# EAGLE board AVR_12V_reset5 (EAGLE 9.5.2)
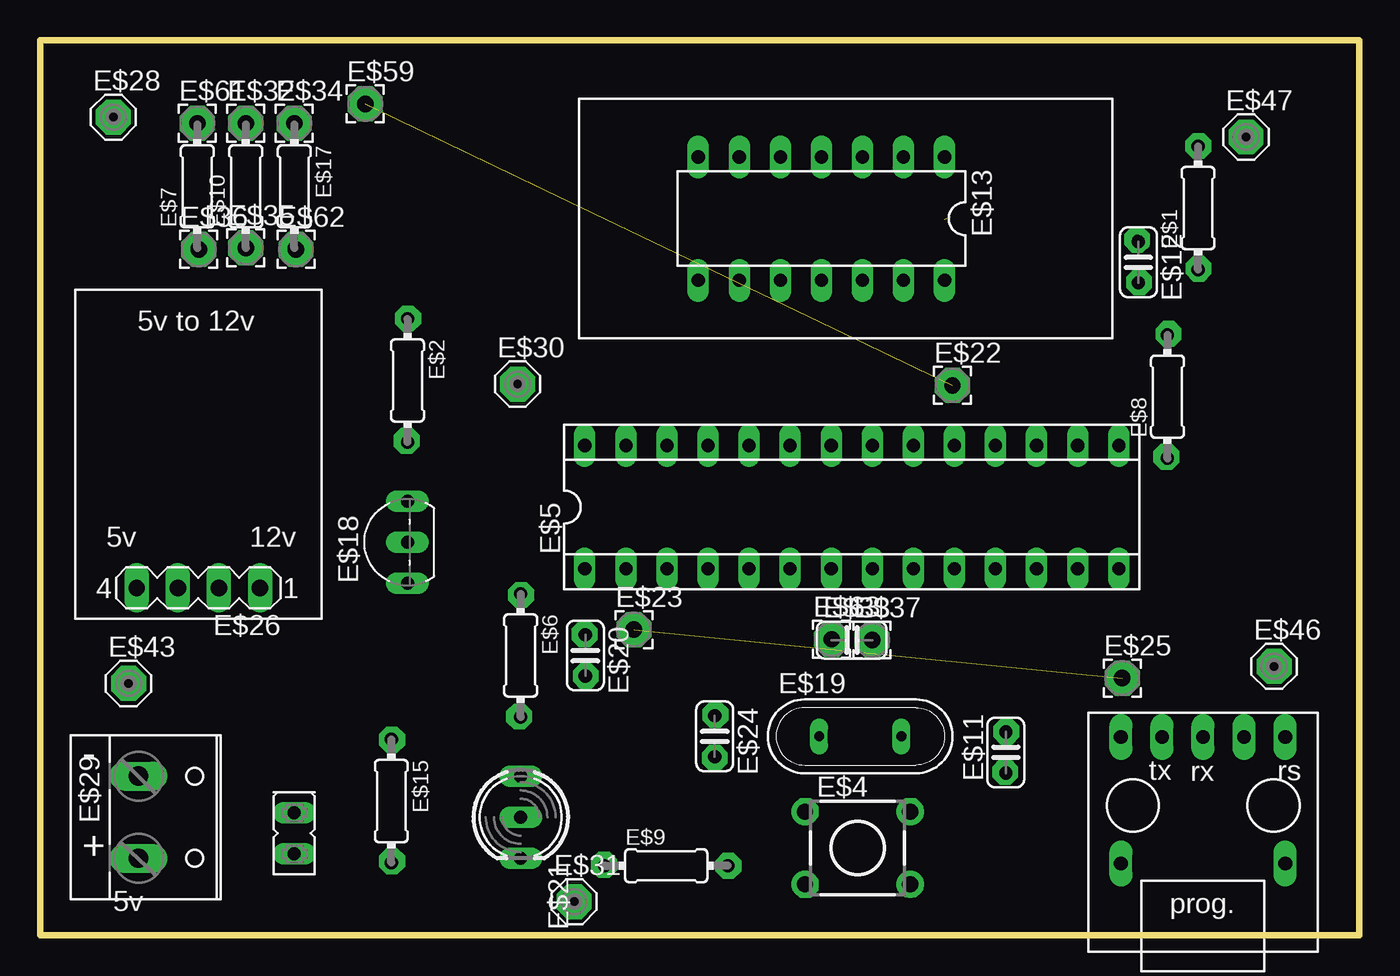
[diagram p0: board, top side]
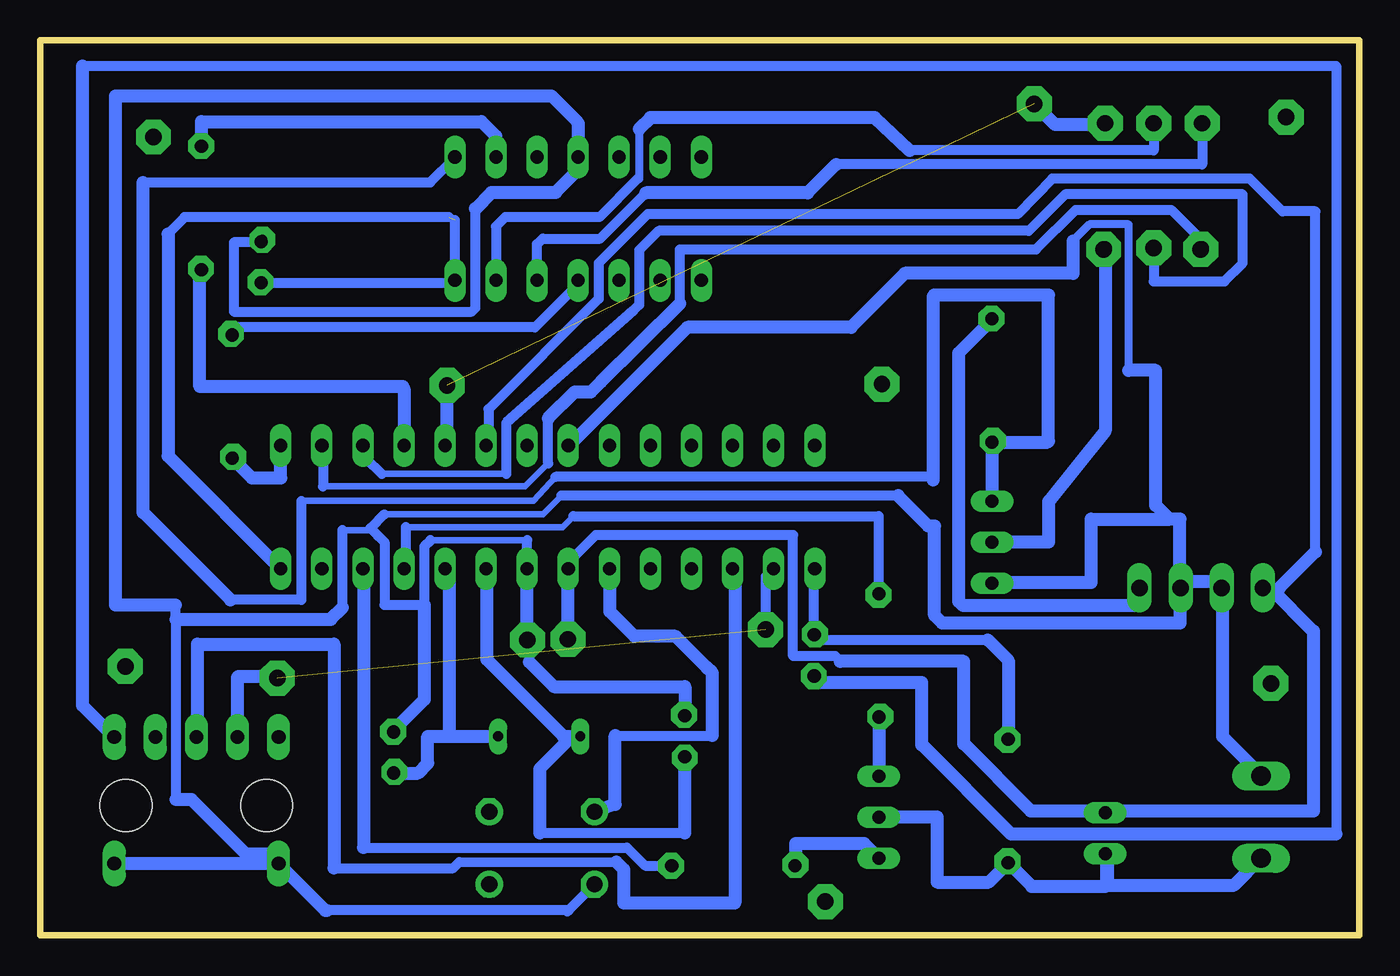
[diagram p1: board, bottom side, seen from below]

Size 81.55 x 55.32 mm. Coordinates in mm from the lower left corner, seen from the top.
Outline: 0,0 0,55.32 81.55,55.32 81.55,0 0,0
Copper layers (1*16): Top 0.035mm / dielectric 1.5mm / Bottom 0.035mm
Design rules "default": minimum track width 10mil, minimum drill 24mil, track to track 8mil, track to pad 8mil, pad to pad 8mil, via to via 8mil, smd to smd 8mil, copper to edge 40mil, drill to drill 8mil, minimum pad ring 10mil, minimum via ring 8mil, stop-mask expansion 4mil, vias tented up to drill 0mil, thermal gap 10mil

## Footprints (pad centres in the part's own frame; a part is rotated, then mirrored left to right if it is on the bottom)
0204/7 = drill 0.813 octagon: 1 -3.81,0; 2 3.81,0
FE02-1 = drill 0.813 long: 1 -1.27,0; 2 1.27,0
TL1105 = drill 1 pad 1.676: 1 -2.25,3.25; 2 2.25,3.25; 3 -2.25,-3.25; 4 2.25,-3.25
SOCKET-28-3 = drill 0.813 long: 1 -16.51,-3.81; 2 -13.97,-3.81; 3 -11.43,-3.81; 4 -8.89,-3.81; 5 -6.35,-3.81; 6 -3.81,-3.81; 7 -1.27,-3.81; 8 1.27,-3.81; 9 3.81,-3.81; 10 6.35,-3.81; 11 8.89,-3.81; 12 11.43,-3.81; 13 13.97,-3.81; 14 16.51,-3.81; 15 16.51,3.81; 16 13.97,3.81; 17 11.43,3.81; 18 8.89,3.81; 19 6.35,3.81; 20 3.81,3.81; 21 1.27,3.81; 22 -1.27,3.81; 23 -3.81,3.81; 24 -6.35,3.81; 25 -8.89,3.81; 26 -11.43,3.81; 27 -13.97,3.81; 28 -16.51,3.81
C025-024X044 = drill 0.813 octagon: 1 -1.27,0; 2 1.27,0
DIL14 = drill 0.813 long: 1 -7.62,-3.81; 2 -5.08,-3.81; 3 -2.54,-3.81; 4 0,-3.81; 5 2.54,-3.81; 6 5.08,-3.81; 7 7.62,-3.81; 8 7.62,3.81; 9 5.08,3.81; 10 2.54,3.81; 11 0,3.81; 12 -2.54,3.81; 13 -5.08,3.81; 14 -7.62,3.81
USB-MICRO-PCB = drill 0.85 pad 1.422 long: P$1 -5.08,6.35; P$2 -2.54,6.35; P$3 0,6.35; P$4 2.54,6.35; P$5 5.08,6.35; P$6 -5.08,-1.47; P$7 5.08,-1.47 | hole 3.2: -4.34,2.12; 4.36,2.12
TO92- = drill 0.813 long: 1 2.54,0; 2 0,0; 3 -2.54,0
QS = drill 0.61 long: 1 -2.54,0; 2 2.54,0
DUOLED5MM = drill 0.813 long: AG -2.54,0; AR 2.54,0; K 0,0
2,15/1,0 = drill 1.016 pad 2.159 octagon: 1 0,0
MA04-1 = drill 1.016 long: 1 -3.81,0; 2 -1.27,0; 3 1.27,0; 4 3.81,0
MCS10B = drill 1.016 pad 2.159 octagon: MP 0,0
W237-132 = drill 1.194 long: 1 -2.54,-0.635; 2 2.54,-0.635

## Placement (x,y rotation side)
E$1  1k  [0204/7]  71.59,44.96 90 top
E$2  1k  [0204/7]  22.7,34.3 270 top
E$3  [FE02-1]  15.7,6.3 90 top
E$4  [TL1105]  50.53,5.39 270 top
E$5  [SOCKET-28-3]  50.17,26.47 0 top
E$6  220  [0204/7]  29.7,17.3 270 top
E$7  1k  [0204/7]  9.7,46.3 90 top
E$8  1k  [0204/7]  69.7,33.3 90 top
E$9  220  [0204/7]  38.7,4.3 0 top
E$10  1k  [0204/7]  12.7,46.3 90 top
E$11  22p  [C025-024X044]  59.7,11.3 90 top
E$12  1uF  [C025-024X044]  67.91,41.61 270 top
E$13  [DIL14]  48.3,44.3 180 top
E$15  10k  [0204/7]  21.7,8.3 270 top
E$16  [USB-MICRO-PCB]  71.9,5.9 0 top
E$17  2.2k  [0204/7]  15.7,46.3 270 top
E$18  s8050  [TO92-]  22.7,24.3 90 top
E$19  [QS]  50.7,12.3 0 top
E$20  1uF  [C025-024X044]  33.7,17.3 270 top
E$21  red/green  [DUOLED5MM]  29.7,7.3 270 top
E$22  [2,15/1,0]  56.4,34 0 top
E$23  [2,15/1,0]  36.7,18.9 0 top
E$24  22p  [C025-024X044]  41.7,12.3 270 top
E$25  [2,15/1,0]  66.9,15.9 0 top
E$26  [MA04-1]  9.77,21.48 180 top
E$28  [MCS10B]  4.51,50.57 0 top
E$29  [W237-132]  6.7,7.3 270 top
E$30  [MCS10B]  29.51,34.07 0 top
E$31  [MCS10B]  33.01,2.08 0 top
E$32  [2,15/1,0]  12.7,50.2 0 top
E$33  1uF  [C025-024X044]  50.17,18.25 0 top
E$34  [2,15/1,0]  15.7,50.2 0 top
E$35  [2,15/1,0]  12.7,42.5 0 top
E$36  [2,15/1,0]  9.8,42.4 0 top
E$37  [2,15/1,0]  51.44,18.25 0 top
E$43  [MCS10B]  5.45,15.57 0 top
E$46  [MCS10B]  76.3,16.62 0 top
E$47  [MCS10B]  74.56,49.35 0 top
E$59  [2,15/1,0]  20.09,51.4 0 top
E$61  [2,15/1,0]  9.7,50.2 0 top
E$62  [2,15/1,0]  15.8,42.4 0 top
E$63  [2,15/1,0]  48.93,18.3 0 top

## Library data of the parts
E$1 E$2 E$6-E$10 E$15 E$17 = eagle-ltspice
E$3 = con-lsta2
E$4 = switch
E$5 = ic-package
E$11 E$12 E$20 E$24 E$33 = ref-packages
E$13 = 74ac-logic
E$16 = LSGPackages
E$18 = transistor-fet
E$19 = special
E$21 = led
E$22 E$23 E$25 E$32 E$34-E$37 E$59 E$61-E$63 = wirepad
E$26 = con-lstb
E$28 E$30 E$31 E$43 E$46 E$47 = solpad
E$29 = con-wago-508

## Nets
12V: E$2.1 E$26.1
GND: E$4.4 E$5.8 E$5.22 E$11.2 E$12.1 E$13.4 E$16.P$6 E$16.P$7 E$18.3 E$24.1 E$26.2 E$26.3 E$29.1 E$33.2
S$2: E$1.2 E$13.2
S$3: E$5.15 E$8.1
S$4: E$17.2 E$18.2
S$5: E$5.2 E$16.P$2 E$23.1 E$25.1
S$7: E$2.2 E$13.1 E$18.1
S$8: E$5.14 E$12.2 E$13.14
S$9: E$5.10 E$11.1 E$19.2
S$10: E$5.9 E$19.1 E$24.2
S$11: E$5.3 E$16.P$3
S$12: E$6.2 E$21.AG
S$13: E$5.16 E$7.1
S$14: E$7.2 E$13.12
S$15: E$5.17 E$10.1
S$16: E$3.1 E$15.2 E$21.K E$29.2
S$17: E$1.1 E$5.18
S$18: E$8.2 E$13.11
S$19: E$5.19 E$17.1 E$22.1 E$59.1
S$20: E$16.P$5 E$20.2
S$21: E$4.3 E$5.6
S$22: E$9.1 E$21.AR
S$23: E$5.11 E$6.1
S$24: E$5.12 E$9.2
S$26: E$10.2 E$13.13
S$27: E$5.1 E$15.1 E$20.1
VCC: E$3.2 E$5.7 E$5.20 E$26.4 E$33.1

## Tracks (layer width: path | path; a pad name or v marks a point on that pad's centre or on a via)
12V
  Bottom 0.61: E$26.1 13.57,20.38 | 22.7,38.05 E$2.1
  Bottom 0.813: 22.7,38.05 24.75,36 24.75,20.62 24.5,20.38 13.57,20.38
GND
  Bottom 0.254: E$12.1 67.96,42.83
  Bottom 0.406: 51.45,24.43 57.42,24.43 | 49.33,27.17 50.48,26.03 60.28,26.03 | 62.86,25.04 61.02,25.04 60.67,24.7
  Bottom 0.508: 17.7,42.92 16.68,43.95 14.25,43.95 14.25,34.92
  Bottom 0.61: 51.33,16.9 51.33,18.18 E$33.2 51.45,18.3 | 51.45,22.55 E$5.8 51.45,22.68 51.45,24.43 | 57.81,20.43 57.81,24.04 57.42,24.43 | 59.7,12.68 E$11.2 | 73.17,8.38 73.17,19.53 73.2,19.53 73.2,20.43 | 48.34,50.29 48.3,50.19 | 57.81,20.43 60.28,20.43 60.28,24.3 60.67,24.7 61.14,25.16 60.28,26.03 | 57.81,20.43 | 62.86,20.26 62.86,25.04 | 11.07,21.55 E$26.2 11.07,21.43 | 6.07,9.93 E$29.1 | 8.45,21.43 E$26.3 | 28.51,27.17 49.33,27.17 | 48.83,30.3 E$5.22 | 22.7,21.8 E$18.3 | 67.96,42.83 69.59,42.83 69.59,38.55 54.88,38.55 54.65,38.78 54.65,44.93 | 48.3,47.31 E$13.4 | 63.82,1.55 48.89,1.55 E$4.4 48.95,1.47
  Bottom 0.813: 51.33,16.9 49.8,15.38 41.7,15.38 E$24.1 | 51.45,18.3 51.45,22.55 | 59.7,12.68 57.81,14.56 57.81,20.43 | 48.34,50.29 49.95,51.9 76.9,51.9 76.9,20.43 73.2,20.43 | 48.3,50.19 E$13.4 | 62.86,20.26 63.6,19.53 73.17,19.53 | 11.72,25.73 11.07,25.73 11.07,21.55 | E$26.3 8.97,21.89 10.53,21.89 E$26.2 | 6.07,9.93 8.45,12.3 8.45,21.43 | 28.51,27.17 26.64,25.3 26.25,25.3 26.25,19.78 25.78,19.3 11.07,19.3 11.07,21.43 | 48.83,30.3 41.55,37.58 31.42,37.58 28.09,40.91 17.7,40.91 17.7,42.92 | 22.7,21.8 16.59,21.8 16.59,25.73 11.72,25.73 | 14.25,34.92 12.57,34.92 12.57,26.58 11.72,25.73 | 54.65,44.93 53.65,45.92 49.69,45.92 48.3,47.31 | 63.82,1.55 63.94,1.55 E$16.P$6 | E$16.P$6 67.39,5 68.81,5 72.2,8.38 73.17,8.38 | E$16.P$6 E$16.P$7
S$2
  Bottom 0.813: E$13.2 53.38,49.4 54.28,50.3 71.59,50.3 E$1.2
S$3
  Bottom 0.813: E$8.1 68.48,28.28 66.69,28.28 E$5.15
S$4
  Bottom 0.813: E$18.2 19.2,24.3 19.2,26.82 15.7,31.19 E$17.2
S$5  (1 unrouted)
  Bottom 0.61: E$5.2 36.7,22.16 E$23.1 | 69.36,15.94 69.3,16 | 67,16 E$25.1
  Bottom 0.813: E$16.P$2 69.36,15.94 | 69.3,16 67,16
S$7
  Bottom 0.406: 49.7,28.34 51.05,26.85 65.42,26.85
  Bottom 0.61: 75.2,46.55 57.45,46.55 55.95,48.05 E$13.1 | 69.79,20.74 65.42,20.74 65.42,26.85 | 26.35,28.15 26.54,28.34 49.7,28.34 | 26.28,39.57 26.35,39.5 | 19.26,30.49 19.2,30.55
  Bottom 0.813: E$18.1 E$2.2 19.26,30.49 | 75.2,46.55 75.2,26.15 69.79,20.74 | 26.35,39.5 26.35,28.15 | 26.28,39.57 19.2,39.57 19.2,30.55
S$8  (1 unrouted)
  Bottom 0.254: 56.07,40.34 E$13.14
  Bottom 0.61: 55.83,40.55 E$13.14 55.92,44.22 | 73.66,43.37 72.63,44.39 56.29,44.39 | E$12.2 56.07,40.34
  Bottom 0.813: E$5.14 73.66,29.63 73.66,43.37
S$9
  Bottom 0.61: E$5.10 56.27,22.4
  Bottom 0.813: 56.27,12.3 57.59,12.3 57.59,10.64 58.2,10.03 E$11.1 | 56.27,12.3 E$19.2 | 56.27,22.4 56.27,12.3
S$10
  Bottom 0.61: 53.95,22.55 E$5.9 | 50.67,6.33 41.7,6.33 | E$19.1 48.66,12.3
  Bottom 0.813: 53.95,22.55 53.95,17.05 49.2,12.3 E$19.1 | 48.66,12.3 50.67,10.29 50.67,6.33 | 41.7,6.33 E$24.2
S$11
  Bottom 0.61: E$5.3 38.6,22.52 | 63.4,4.15 56.03,4.15 55.64,4.53 45.92,4.52 | 71.83,12.3 E$16.P$3
  Bottom 0.813: 38.6,22.52 38.6,2 45.47,2 45.47,4.08 45.92,4.52 | 63.4,4.15 63.4,18 71.83,18 71.83,12.3
S$12
  Bottom 0.813: E$6.2 E$21.AG
S$13
  Bottom 0.406: 50.15,29.18 51.58,27.75 64.08,27.75
  Bottom 0.61: E$7.1 9.7,42.92 11.62,44.85 17.53,44.85 19.98,42.4 42,42.4 42,39.05 | 50.15,29.18 50.15,31.95 | 64.08,27.75 64.08,30.18 E$5.16
  Bottom 0.813: 50.15,31.95 48.5,33.6 47.5,33.6 46.9,34.2 42,39.05
S$14
  Bottom 0.61: E$13.12 50.84,42.72 50.49,43.07 46.93,43.07 44.11,45.89 | 32.35,47.65 9.7,47.65 E$7.2
  Bottom 0.813: 32.35,47.65 34.11,45.89 44.11,45.89
S$15
  Bottom 0.406: 52.75,28.52 60.45,28.52
  Bottom 0.61: 60.45,28.52 61.36,29.43 E$5.17 | 52.75,28.52 52.75,31.68 44.9,38.6 44.53,38.97 44.53,42.35 43.33,43.55 20.43,43.55 18.18,45.8 7.2,45.8 7.2,41.55 8.32,40.42 12.7,40.42 E$10.1
S$16
  Bottom 0.61: 15.7,3.02 E$3.1 15.57,4.92
  Bottom 0.813: 15.7,3.02 20.23,3.02 E$15.2 22.9,3.29 26.1,3.29 26.1,7.3 E$21.K | E$29.2 7.72,3.1 15.57,3.1 15.57,4.92
S$17
  Bottom 0.254: 71.7,41.04 E$1.1
  Bottom 0.61: 59.13,33.92 59.06,33.79
  Bottom 0.813: 59.13,33.92 71.7,33.92 71.7,41.04 | 59.06,33.79 E$5.18
S$18
  Bottom 0.61: E$8.2 69.7,37.57 50.98,37.57 48.45,40.1 E$13.11
S$19  (1 unrouted)
  Bottom 0.61: E$5.19 56.4,30.4
  Bottom 0.813: 56.4,30.4 E$22.1 | E$17.1 18.8,50.11 E$59.1
S$20
  Bottom 0.61: 1.43,6.25 1.43,53.74 78.95,53.74 | 33.7,15.62 E$20.2
  Bottom 0.813: 33.7,15.62 27.05,15.62 27.05,11.78 21.53,6.25 1.43,6.25 | 78.95,53.74 78.95,14.22 E$16.P$5
S$21
  Bottom 0.61: 46,12.35 40,12.35 | 46.33,22.55 E$5.6
  Bottom 0.813: 46.33,22.55 46.33,20 44.8,18.48 42.26,18.48 40.38,16.6 40,16.23 40,12.35 | 46,12.35 46,8.1 E$4.3
S$22
  Bottom 0.61: 34.83,4.3 E$9.1
  Bottom 0.813: E$21.AR 30.61,5.67 34.83,5.67 34.83,4.3
S$23
  Bottom 0.406: 58.95,25.23 49.28,25.23 48.59,25.91
  Bottom 0.61: 48.59,25.91 29.7,25.91 E$6.1 | 58.95,25.23 58.95,22.68 E$5.11
S$24
  Bottom 0.61: E$9.2 44.15,4.3 45.28,5.42 61.58,5.42 | 61.58,22.55 E$5.12
  Bottom 0.813: 61.58,22.55 61.58,5.42
S$25  (via drill 0.6 pad 1.6)
  other vias: 33.73,16.02
S$26
  Bottom 0.508: 44.53,49.85 44.53,46.76 44.62,46.76
  Bottom 0.61: 27.81,48.52 12.7,48.52 E$10.2 | 44.62,46.76 46.98,44.4 52.8,44.4 53.38,43.82 E$13.13
  Bottom 0.813: 44.53,49.85 43.83,50.55 29.95,50.55 27.81,48.52
S$27
  Bottom 0.61: 33.7,18.25 33.7,18.3 | 33.7,18.3 33.6,18.4 33.6,18.3 | 33.6,18.3 33.6,18.27 22.97,18.27 | 33.7,18.3 33.6,18.3 | 33.7,18.3 E$20.1 33.7,22.55 E$5.1
  Bottom 0.813: E$15.1 21.7,17 22.97,18.27
S$28  (via drill 0.6 pad 1.6)
  other vias: 33.65,18.61
S$29  (via drill 0.6 pad 1.6)
  other vias: 29.73,21.04
S$30  (via drill 0.6 pad 1.6)
  other vias: 29.61,13.52
S$31  (via drill 0.6 pad 1.6)
  other vias: 21.74,12.09
S$32  (via drill 0.6 pad 1.6)
  other vias: 22.73,38.13
S$33  (via drill 0.6 pad 1.6)
  other vias: 22.64,30.58
S$34  (via drill 0.6 pad 1.6)
  other vias: 67.95,40.37
S$35  (via drill 0.6 pad 1.6)
  other vias: 67.82,43.01
S$36  (via drill 0.6 pad 1.6)
  other vias: 69.63,29.58
S$37  (via drill 0.6 pad 1.6)
  other vias: 69.77,37.18
S$38  (via drill 0.6 pad 1.6)
  other vias: 71.63,41.22
S$39  (via drill 0.6 pad 1.6)
  other vias: 71.61,48.8
S$40  (via drill 0.6 pad 1.6)
  other vias: 47.31,7.66
S$41  (via drill 0.6 pad 1.6)
  other vias: 53.81,7.66
S$42  (via drill 0.6 pad 1.6)
  other vias: 42.54,4.29
S$43  (via drill 0.6 pad 1.6)
  other vias: 47.32,3.12
S$44  (via drill 0.6 pad 1.6)
  other vias: 53.8,3.14
S$45  (via drill 0.6 pad 1.6)
  other vias: 34.86,4.35
S$46  (via drill 0.6 pad 1.6)
  other vias: 21.74,4.58
S$47  (via drill 0.6 pad 1.6)
  other vias: 41.7,10.97
S$48  (via drill 0.6 pad 1.6)
  other vias: 41.74,13.63
S$49  (via drill 0.6 pad 1.6)
  other vias: 59.66,10.1
S$50  (via drill 0.6 pad 1.6)
  other vias: 59.74,12.59
VCC
  Bottom 0.61: 48.95,18.3 E$33.1 | 48.95,22.55 E$5.7 48.91,23.04 47.21,24.73 35,24.73 35,17.25 32.39,17.25 32.08,16.93 | 5.5,21.48 E$26.4 4.92,21.48 | 15.7,7.67 E$3.2 15.82,7.67 | 2.7,23.7 2.7,44.75 4.74,44.75 6.76,46.78 18.97,46.78 21.11,44.58 44,44.58 47.03,41.55 47.03,39.35 53.85,32.52 53.85,30.4 53.95,30.3 E$5.20
  Bottom 0.813: 48.95,22.55 48.95,18.3 | 15.7,7.67 2.82,7.67 2.82,18.8 5.5,21.48 | 4.92,21.48 2.7,23.7 | 32.08,16.93 24.45,16.93 24.45,11.83 20.3,7.67 15.82,7.67

## Text on the board
tPlace: 5v to 12v | 5v | 12v | - | tx | rx | rs | + | 5v | prog.